# Altium PCB Discrete_3V3_Linear_Regulator.PcbDoc
Units mm, origin at the board's own origin, x right, y up, seen from the top; angles counter-clockwise.
Board outline 30.48 x 24.1 mm, 2 copper layers (Top Layer, Bottom Layer); 21 components, 11 nets, 47 pads, 3 vias.
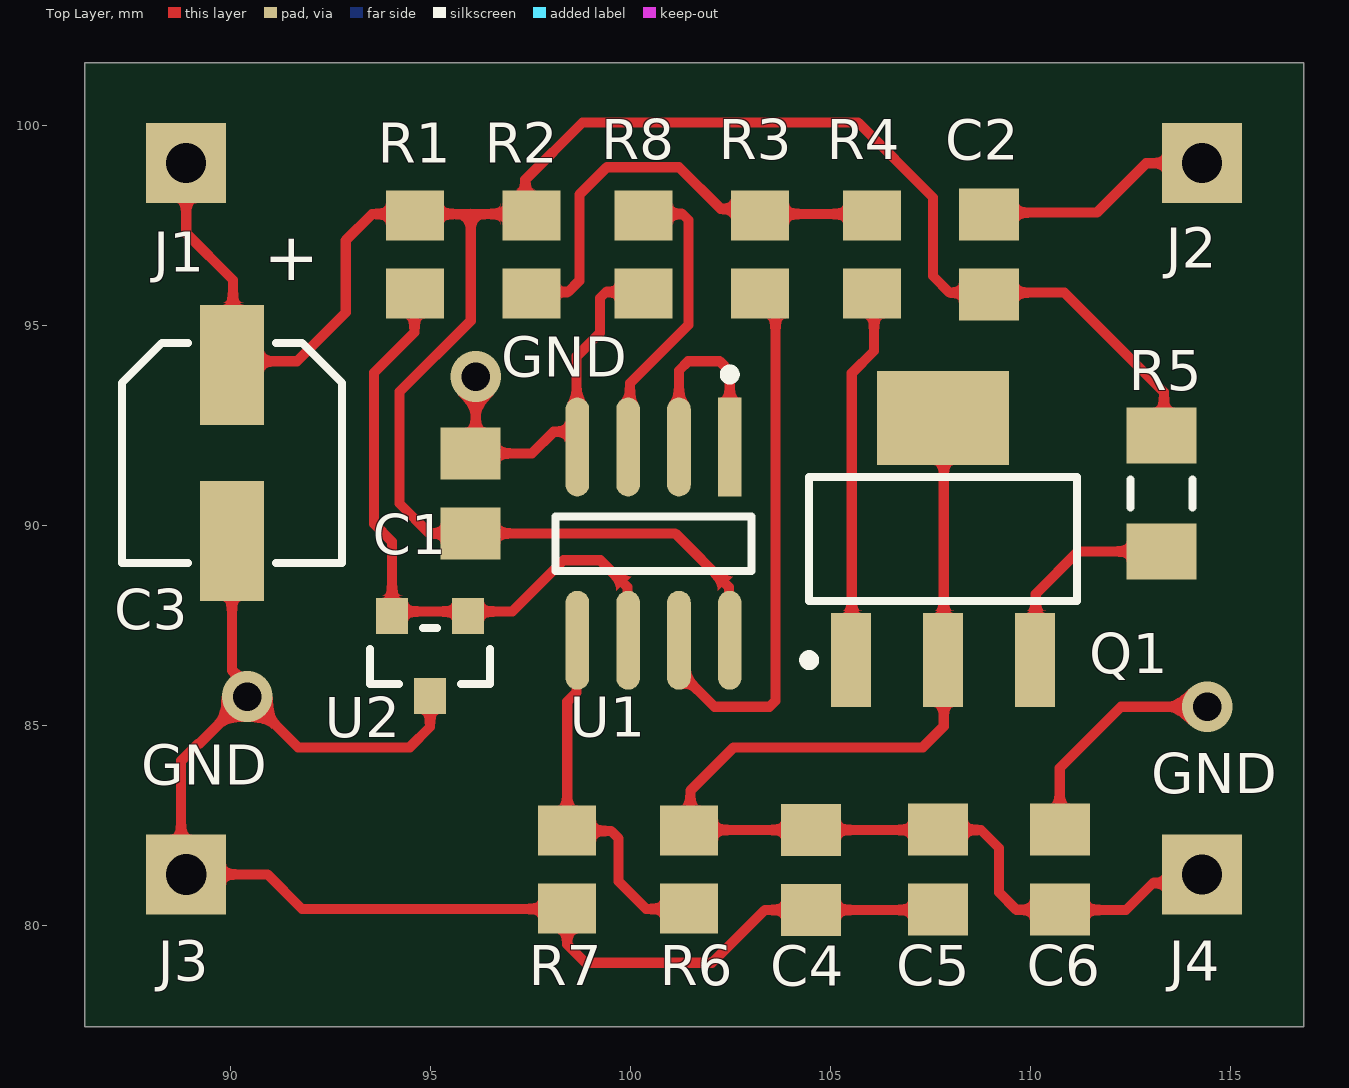
[diagram p0: Top Layer view]
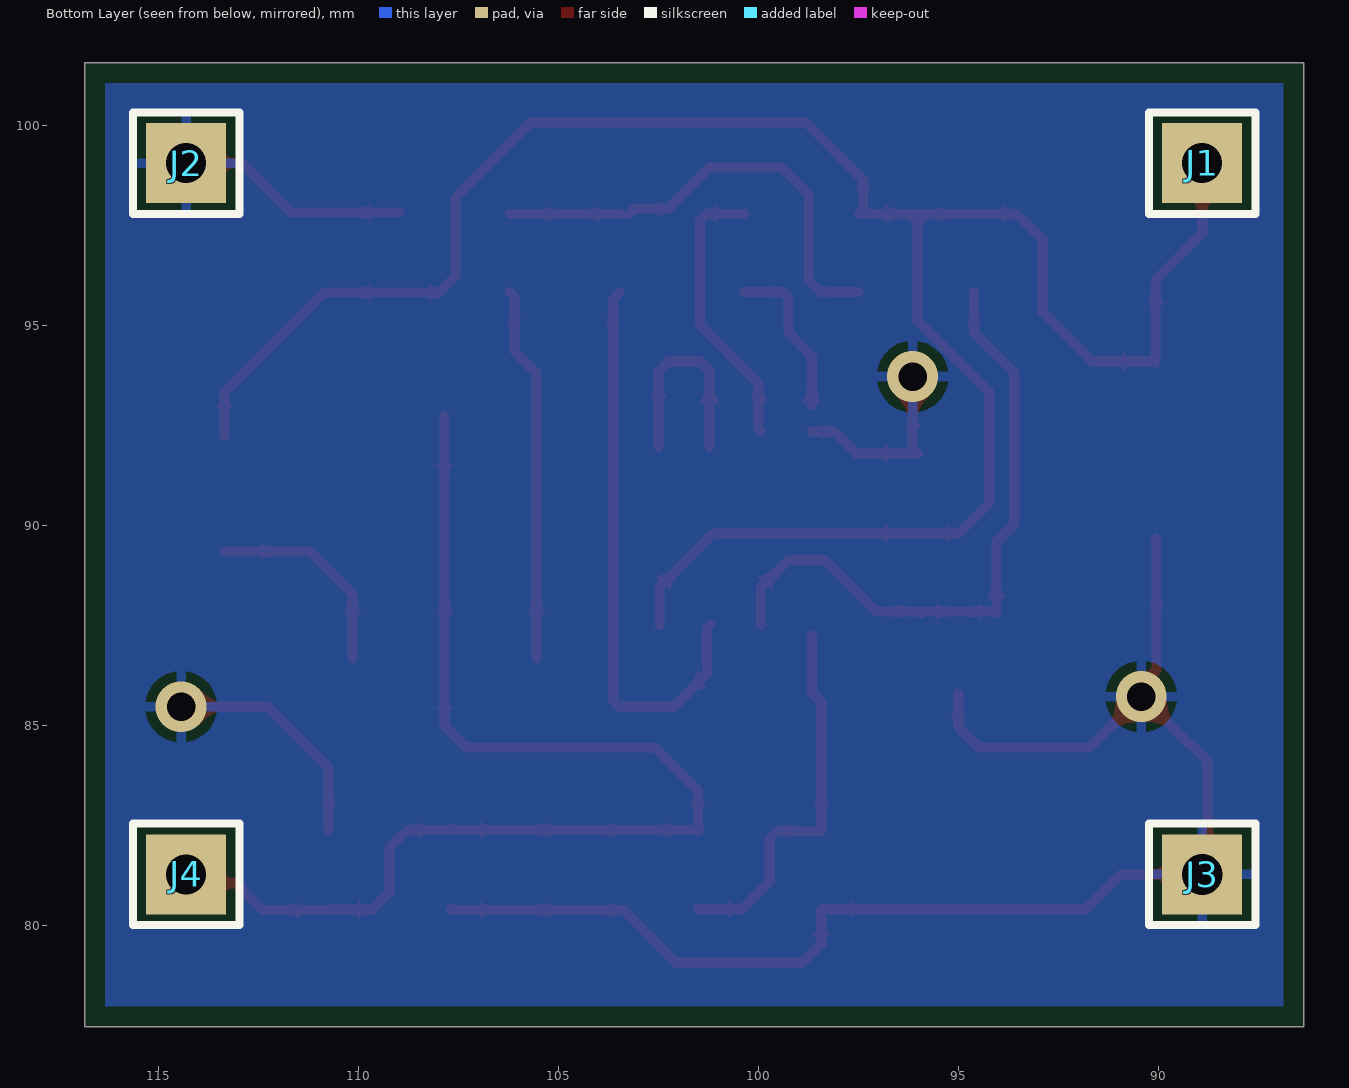
[diagram p1: Bottom Layer view, seen from below]
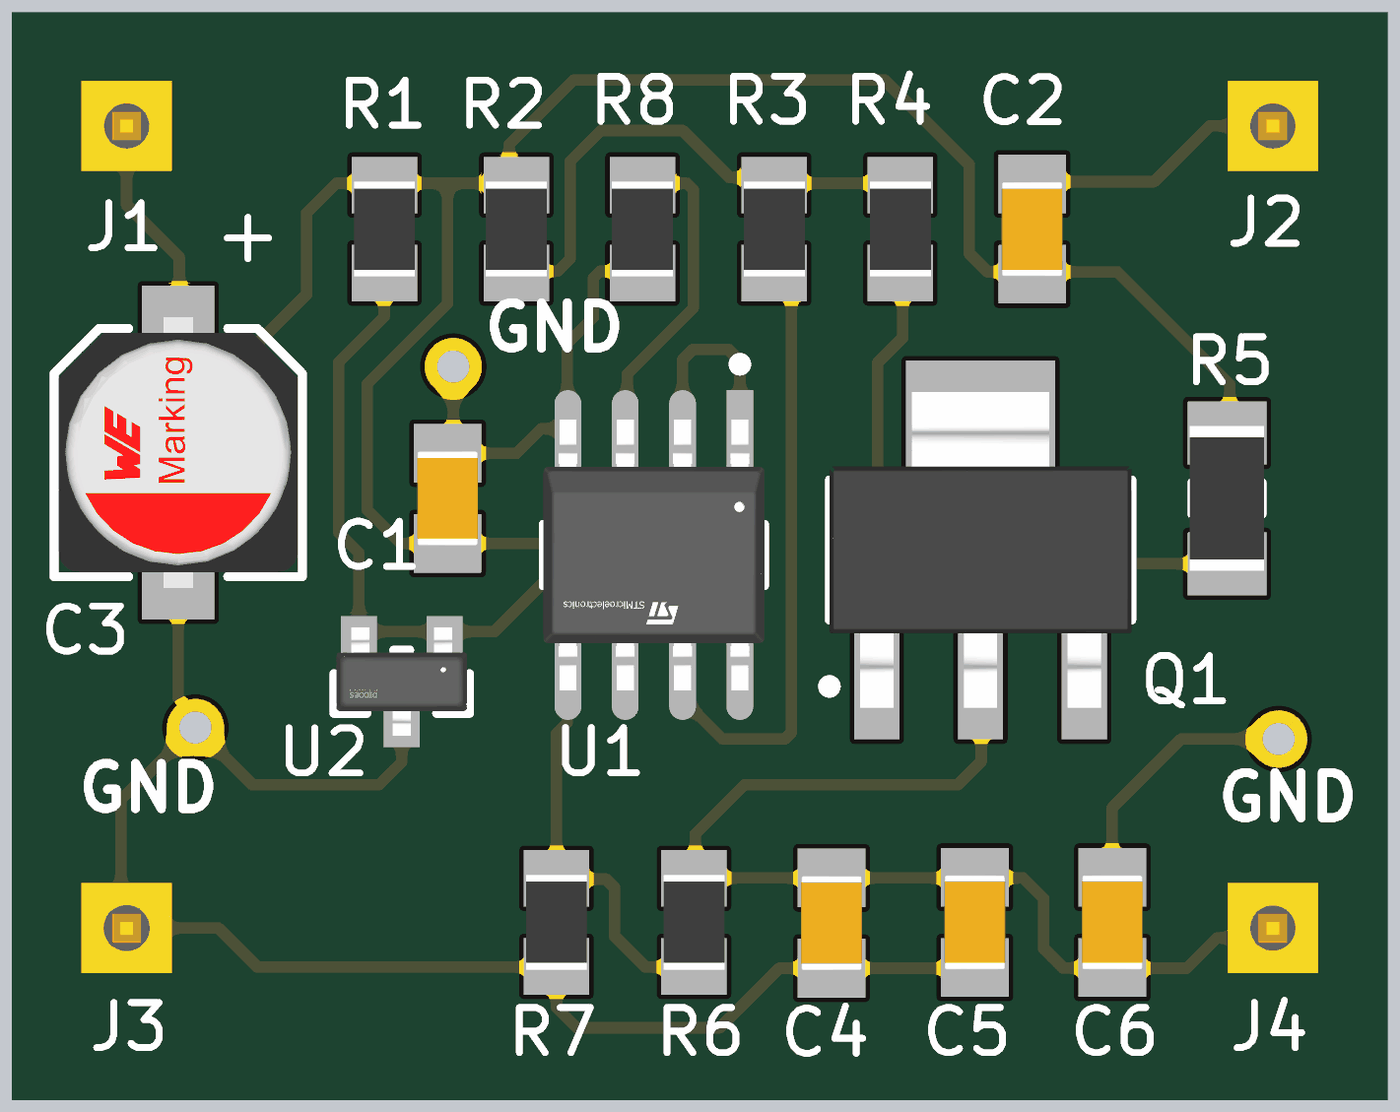
[diagram p2: 3D render of the assembled board from above, using the file's embedded part models]

## Layer stack, top to bottom
Top Solder: solder mask 0.0102, Solder Resist, Dk 3.5
Top Layer: signal copper 0.0356
Dielectric 1: dielectric 0.32, FR-4, Dk 4.8
Bottom Layer: signal copper 0.0356
Bottom Solder: solder mask 0.0102, Solder Resist, Dk 3.5

## Board outline
86.36,77.47 116.84,77.47 116.84,101.575 86.36,101.575

## Design rules (kind name [scope] priority, off if disabled: settings)
BoardOutlineClearance [All] p1: gap=0.508 ignorepadtopadclearanceinfootprint=FALSE
Clearance [All] p1: gap=0.254 ignorepadtopadclearanceinfootprint=FALSE
PolygonConnect [All] p1: connectstyle=Relief reliefconductorwidth=0.254 reliefentries=4 polygonreliefangle="90 Angle" airgapwidth=0.254
RoutingVias [All] p1: holewidth=0.711 width=1.27 viastyle="Through Hole" minholewidth=0.711 minwidth=1.27 maxholewidth=0.711 maxwidth=1.27
SilkToSilkClearance [All] p1: silktosilkclearance=0.1
SilkToSolderMaskClearance [IsPad] p1: minsilkscreentomaskgap=0.1 clearancetoexposedcopper=TRUE
SolderMaskExpansion [All] p1: expansion=0.102 istentingtop=FALSE
SupplyNets "Schematic Supply Nets_1" [InNet('+5')] p1: voltage=0.000
SupplyNets "Schematic Supply Nets" [InNet('GND')] p2: voltage=0.000
Width [All] p1: maxlimit=0.254 minlimit=0.254 preferedwidth=0.254
28 further rules are at their usual default settings.

## Components (designator, comment, footprint, x,y, rotation, side; value= is the part's Value field where it differs from the comment)
C1 "0.1 µF" CAP_0805_IPC_M 96.012,90.805 r90 top
C2 "10 µF" CAP_0805_IPC_M 108.966,96.774 r90 top
C3 "10 µF" WCAP-PSLP_D5H5.5 90.043,91.821 r90 top locked value=100µF
C4 "22 µF" CAP_0805_IPC_M 104.521,81.391 r270 top
C5 "0.1 µF" CAP_0805_IPC_M 107.696,81.407 r270 top
C6 "22 µF" CAP_0805_IPC_M 110.744,81.407 r90 top
J1 "HTSW-101-07-L-S" FP-HTSW-101-07-L-S-MFG#1 88.9,99.06 r180 bottom
J2 "HTSW-101-07-L-S" FP-HTSW-101-07-L-S-MFG#1 114.3,99.06 r180 bottom
J3 "HTSW-101-07-L-S" FP-HTSW-101-07-L-S-MFG#2 88.9,81.28 r180 bottom
J4 "HTSW-101-07-L-S" FP-HTSW-101-07-L-S-MFG#1 114.3,81.28 r180 bottom
Q1 "FZT1151ATA" SOT223_4P_TAB_IPC_L 107.823,89.662 r90 top
R1 "1.8 kΩ" RES_0805_IPC_M 94.615,96.774 r270 top locked
R2 "10 kΩ" RES_0805_IPC_M 97.536,96.774 r270 top
R3 "2.7 kΩ" RES_0805_IPC_M 103.251,96.774 r90 top
R4 "470 Ω" RES_0805_IPC_M 106.045,96.774 r270 top
R5 "0.22 Ω" RES_1206_IPC_M 113.284,90.805 r270 top
R6 "10 kΩ" RES_0805_IPC_M 101.473,81.407 r270 top
R7 "30.1 kΩ" RES_0805_IPC_M 98.425,81.407 r270 top
R8 "10 kΩ" RES_0805_IPC_M 100.33,96.774 r270 top
U1 "LM358ADT" FP-SO8-IPC_A 100.584,89.549 r270 top
U2 "TL431ASA-7" FP-SOT23-MFG 94.996,86.741 r270 top

## Footprints (in the part's own frame and the unit in brackets; to place one, negate y for a bottom-side part, rotate by r counter-clockwise, add the part's x,y. Pads: shape width x height; smd on the part's side, far side on the other; paste and mask are expansions set on the pad)
CAP_0805_IPC_M [mm] "Chip capacitor 0805 (2.00x1.25x0.50mm) - IPC Most"
  rect 1.3x1.5 smd: 1(-1,0) 2(1,0)
  body extent -1.05,-0.67 1.05,0.67, height 0.6
FP-HTSW-101-07-L-S-MFG#1 [mm]
  rect 2x2 hole 1 paste-2539.97 mask+0: 1(0,0)
  silkscreen extent -1.33,-1.27 1.33,1.27, body extent -1.27,-1.24 1.27,1.24, height 8.38
FP-HTSW-101-07-L-S-MFG#2 [mm]
  rect 2x2 hole 1.02 paste-2539.97 mask+0: 1(0,0)
  silkscreen extent -1.33,-1.27 1.33,1.27, body extent -1.27,-1.24 1.27,1.24, height 8.38
FP-SO8-IPC_A [mm]
  rect 2.474x0.592 smd paste+0 mask+0: 1(-2.416,1.905)
  rrect100% 2.474x0.592 smd paste+0 mask+0: 2(-2.416,0.635) 3(-2.416,-0.635) 4(-2.416,-1.905) 5(2.416,-1.905) 6(2.416,-0.635) 7(2.416,0.635) 8(2.416,1.905)
  silkscreen extent -4.35,-2.45 0.68,2.45, body extent -4.15,-2.95 4.15,2.95, height 0.25
FP-SOT23-MFG [mm]
  rect 0.9x0.8 smd paste+0 mask+0: 1(-1,0.95) 2(-1,-0.95) 3(1,0)
  silkscreen extent -0.7,-1.5 0.7,1.5, body extent -1.55,-1.6 1.55,1.6, height 0.25
RES_0805_IPC_M [mm] "Chip resistor 0805 (2.00x1.25x0.50mm) - IPC Most"
  rect 1.25x1.45 smd: 1(-0.975,0) 2(0.975,0)
  body extent -1.05,-0.67 1.05,0.67, height 0.6
RES_1206_IPC_M [mm] "Chip resistor 1206 (3.10x1.55x0.55mm) - IPC Most"
  rect 1.4x1.75 smd: 1(-1.45,0) 2(1.45,0)
  silkscreen extent -0.35,-0.77 0.35,0.77, body extent -1.6,-0.82 1.6,0.82, height 0.65
SOT223_4P_TAB_IPC_L [mm] "SOT223, 4-Leads, Body 6.50x7.00mm (avg), Pitch 2.30mm, IPC Low Density"
  rect 2.35x1 smd: 1(-3.025,2.3) 2(-3.025,-2.3) 3(-3.025,0)
  rect 2.35x3.3 smd: 4(3.025,0)
  silkscreen extent -3.15,-3.35 1.55,3.47, body extent -3.5,-3.35 3.5,3.35, height 1.7
WCAP-PSLP_D5H5.5 [mm] "Aluminum Polymer Capacitors, body diameter 5mm"
  rect 3x1.6 smd: 1(2.2,0) 2(-2.2,0)
  silkscreen extent -2.75,-2.75 2.75,2.75, body extent -3,-2.65 3,2.65, height 5.5

## Part data
C1 C5: library part C, "Generic non-polarized capacitor (ceramic/film), value defined per instance", Supplier Part Number=490-16471-1-ND, Supplier=DigiKey
C2: library part C, "Generic non-polarized capacitor (ceramic/film), value defined per instance", Supplier Part Number=445-12654-1-ND, Supplier=DigiKey
C3: library part C_POL, "WCAP-PSLP Radial Can - SMD Aluminum Polymer Capacitor 0.197Dia 5.00mm ±20% 100muF 10V", Case/Package=Radial, ESR (Equivalent Series Resistance)=30mΩ, Leakage Current=300µA, Manufacturer="Wurth Elektronik", Manufacturer Part Number=875105242010, Max Operating Temperature=105°C, Min Operating Temperature=-55°C, Ripple Current=1.97A, Supplier Part Number=732-6410-1-ND, Tolerance=20%, Voltage Rating=10V, Category="Polymer Capacitors", ComponentLink1Description=https://datasheet.octopart.com:443/875105242010-W%C3%BCrth-Elektronik-datasheet-37144755.pdf?src-supplier=Wurth+Elektronik, ComponentLink1URL=https://datasheet.octopart.com:443/875105242010-W%C3%BCrth-Elektronik-datasheet-37144755.pdf?src-supplier=Wurth+Elektronik, ComponentLink2Description=https://datasheet.octopart.com:443/875105242010-Wurth-Elektronik-datasheet-181970813.pdf?src-supplier=Future+Electronics, ComponentLink2URL=https://datasheet.octopart.com:443/875105242010-Wurth-Elektronik-datasheet-181970813.pdf?src-supplier=Future+Electronics, Diameter=5mm, Dissipation Factor=8%, Height=5.5mm, Height - Seated (Max)=5.5118mm, Length=5.5mm, Life (Hours)=2000hours, Material=Polymer, Mounting Technology="Surface Mount", Packaging="Tape & Reel (TR)", Pitch=5.3mm, Polarity=Polar, Pricing="1=0.6, 50=0.508, 100=0.441, 250=0.392, 500=0.343 (USD)", REACH SVHC=Unknown, RoHS=Compliant, Stock=19542, Supplier=DigiKey, Supplier 1=Newark, Supplier Part Number 1=875105242010, Voltage Rating (DC)=10V, Width=5.3mm
C4 C6: library part C, "Generic non-polarized capacitor (ceramic/film), value defined per instance", Supplier Part Number=445-5723-1-ND, Supplier=DigiKey
J1 J2 J3 J4: library part CMP-02766-001464-1, "CONN HEADER VERT 1POS", Housing Color=Natural, Max Current Rating=7.6A, Max Operating Temperature=125°C, Max Voltage Rating (AC)=550V, Min Operating Temperature=-55°C, Supplier Part Number=SAM15192-ND, Contact Material=Bronze, Contact Plating=Gold, Depth=2.48mm, Gender=Male, Housing Material=Polymer, Length=2.54mm, Number of Contacts=1, Number of Rows=1, Orientation=Straight, Packaging=Bulk, Radiation Hardening=No, REACH SVHC="No SVHC", RoHS Compliant=Yes, Supplier=DigiKey, Termination=Solder
Q1: library part BJT_PNP, "Generic PNP BJT transistor symbol (discrete)", Supplier Part Number=FZT1151ACT-ND, Supplier=DigiKey
R1 R2 R3 R4 R5 R6 R7 R8: library part R, "Generic resistor, value defined per instance"
U1: library part CMP-12131-000002-1, "IC OPAMP GP 2 CIRCUIT 8SO", Input Bias Current=0.02uA, Input Offset Voltage=1mV, Manufacturer=STMicroelectronics, Max Dual Supply Voltage=15V, Max Junction Temp=+150°C, Max Supply Voltage=30V, Min Dual Supply Voltage=1.5V, Min Supply Voltage=3V, Nominal Supply Current=0.7mA, Output Current Per Channel=50-20000uA, Package=SO8, Supplier Part Number=497-1590-1-ND, Temperature="0°C to +70°C", Temperature Range High=+70°C, Temperature Range Low=0°C, Voltage Gain=100V/mV, Automotive=No, Category=IC, ComponentLink2Description=Datasheet, ComponentLink2URL=https://www.st.com/content/ccc/resource/technical/document/datasheet/61/46/87/01/98/ed/44/c5/CD00000464.pdf/files/CD00000464.pdf/jcr:content/translations/en.CD00000464.pdf, Device Class L1="Integrated Circuits (ICs)", Device Class L2="Linear ICs", Device Class L3="Amplifiers - Op Amps", Digikey Description="IC OPAMP GP 2 CIRCUIT 8SO", Gain Bandwidth=1.1MHz, Height=1.75mm, Lead Free=Yes, Manufacturer Part Number=LM358ADT, Mouser Description="In a Pack of 20, LM358ADT STMicroelectronics, Low Power, Op Amp, 1.1MHz, 5 ? 28 V, 8-Pin SOIC", Number Of Channels=2, Octopart=https://octopart.com/lm358adt-stmicroelectronics-410420, RoHS=TRUE, Standoff Height=0.1mm, Supplier=DigiKey
U2: library part CMP-12755-000001-1, "IC VREF SHUNT ADJ SOT23-3", Ambient Temperature Range High=+125°C, Ambient Temperature Range Low=-40°C, Manufacturer="DIODES INC.", Max Junction Temp=+150°C, Max Power Dissipation=330mW, Package=SOT23, Supplier Part Number=TL431ASA-7DICT-ND, Temperature="to +150°C", Automotive=No, Category=IC, ComponentLink2Description=Datasheet, ComponentLink2URL=https://www.diodes.com/assets/Datasheets/TL431_432.pdf, Device Class L1="Integrated Circuits (ICs)", Device Class L2="Power Management ICs", Device Class L3="Voltage References", Digikey Description="IC VREF SHUNT ADJ SOT23-3", Footprint Url=https://www.diodes.com/assets/Package-Files/SOT23.pdf, Height=1.1mm, Ipc Land Pattern Name=SOT92P240X102-3, Lead Free=Yes, Manufacturer Part Number=TL431ASA-7, Mouser Description="V-Ref Adjustable 2.495V to 36V 100mA 3-Pin SOT-23 T/R", Octopart=https://octopart.com/tl431asa-7-diodes+inc.-18832779, Output Type=AdjustableProgrammable, Reference Type=Shunt, RoHS=TRUE, Standoff Height=0.013mm, Supplier=DigiKey, Temperature Range High=+150°C

## Via types
v1: diameter 1.27, hole 0.711, Top Layer to Bottom Layer, 3 vias

## Nets (pads, with @x,y where several pads share a name; then routed paths per layer and width w, separated by ;. In a path a pad name is that pad's centre, name@x,y a point inside that pad or via, vN(x,y) a via of type N, cw(c..) or ccw(c..) an arc to the next point about the centre after c; other vN are vias at no path point)
+5: C1.1 C2.1 C3.1 J1.1 R1.1 R2.1 R5.1 U1.8 | length 55.9
  Top Layer w0.254: J1.1 88.9,97.307 90.068,96.139 90.068,94.072 90.104,94.107 91.669,94.107 92.888,95.326 92.888,97.13 93.532,97.774 ; 93.548,97.79 94.607,97.79 96.012,97.79 ; R2.1@97.479,97.79 R2.1@97.377,97.892 ; U1.8@102.471,87.516 102.471,88.457 101.123,89.805 C1.1 94.98,89.805 94.234,90.551 94.234,93.345 96.012,95.123 96.012,97.79 ; R5.1@113.344,92.255 113.344,93.336 110.856,95.824 108.966,95.824 107.984,95.824 107.569,96.239 107.569,98.204 105.697,100.076 98.806,100.076 97.377,98.647 R2.1@97.377,97.892 ; 96.012,97.79 97.275,97.79 R2.1@97.377,97.892
Base: Q1.1 R4.2 | length 9.4
  Top Layer w0.254: Q1.1@105.54,86.695 105.54,93.809 106.096,94.365 106.096,95.724 R4.2@106.212,95.84
Base_Network: R2.2 R3.2 R4.1 | length 11.5
  Top Layer w0.254: R2.2@97.479,95.84 98.448,95.84 98.73,96.121 98.73,98.273 99.416,98.958 101.22,98.958 102.261,97.917 103.096,97.917 R3.2@103.223,97.79 ; R3.2@103.458,97.79 106.094,97.79 R4.1@106.212,97.79
Collector: C4.1 C5.1 C6.1 J4.1 Q1.3 Q1.4 R6.1 | length 30.8
  Top Layer w0.254: R6.1 101.489,82.366 R6.1@101.503,82.366 ; C5.1 107.675,82.407 107.659,82.391 108.769,82.391 109.22,81.94 109.22,80.83 109.655,80.395 110.733,80.395 110.737,80.391 112.395,80.391 113.068,81.064 113.703,81.064 113.919,81.28 J4.1@114.3,80.899 ; C5.1@107.759,82.391 C4.1 101.528,82.391 R6.1@101.503,82.366 ; Q1.4@107.84,92.745 107.84,86.695 107.84,84.98 107.315,84.455 102.586,84.455 101.503,83.372 R6.1@101.503,82.366
Emitter: Q1.2 R5.2 | length 5.2
  Top Layer w0.254: Q1.2@110.14,86.695 110.14,88.291 111.203,89.355 R5.2@113.344,89.355
FB: R6.2 R7.1 U1.5 | length 9.5
  Top Layer w0.254: U1.5@98.661,87.249 98.661,85.834 98.425,85.598 98.425,82.366 99.523,82.366 99.71,82.179 99.71,81.103 100.397,80.416 R6.2@101.503,80.416
GND: C1.2 C2.2 C3.2 C4.2 C5.2 C6.2 J2.1 J3.1 R7.2 R8.2 U1.4 U2.3 | length 56.9
  Top Layer w0.254: C3.2@90.068,89.672 90.043,89.646 C3.2 90.043,86.381 90.424,86 v1(90.424,85.725) ; U2.3@94.996,85.801 U2.3 94.996,84.963 94.488,84.455 91.694,84.455 v1(90.424,85.725) ; v1(96.139,93.726) 96.139,91.932 C1.2 97.545,91.805 98.088,92.348 U1.4@98.661,92.348 ; U1.4@98.661,93.006 98.661,94.237 99.245,94.821 99.245,95.691 99.394,95.84 R8.2@100.351,95.84 ; C4.2 103.367,80.391 102.046,79.07 98.882,79.07 98.425,79.527 98.425,80.416 91.796,80.416 90.932,81.28 J3.1 88.773,81.407 88.773,84.125 89.185,84.536 89.214,84.536 90.403,85.725 v1(90.424,85.725) ; C4.2@104.581,80.391 107.659,80.391 107.675,80.407 C5.2 ; C2.2@108.966,97.824 111.667,97.824 112.903,99.06 J2.1 ; C6.2@110.737,82.391 110.737,83.94 112.268,85.471 v1(114.427,85.471)
NetR8_1: R8.1 U1.3 | length 7.1
  Top Layer w0.254: U1.3@99.931,92.348 99.996,92.413 99.996,93.557 101.457,95.018 101.457,97.641 101.308,97.79 R8.1@100.351,97.79
OpAmp_Out: R3.1 U1.7 | length 14.3
  Top Layer w0.254: U1.7@101.201,87.516 101.284,87.433 101.284,86.295 102.108,85.471 103.483,85.471 103.632,85.62 103.632,95.665 R3.1@103.458,95.84
Vout_A_Null: U1.1 U1.2 | length 5.3
  Top Layer w0.254: U1.2 101.219,93.878 101.448,94.107 102.235,94.107 102.489,93.853 U1.1
Vref: R1.2 U1.6 U2.1 U2.2 | length 16.3
  Top Layer w0.254: R1.2@94.607,95.84 94.607,94.834 93.599,93.826 93.599,90.043 94.046,89.596 94.046,87.801 94.096,87.851 95.896,87.851 95.946,87.801 95.996,87.851 97.049,87.851 98.332,89.134 99.254,89.134 99.931,88.457 U1.6@99.931,87.516

## Polygon pours and split planes (outlines as drawn)
GND on Bottom Layer "GND_L02_P000" (solid, pour order 0): 86.36,101.6 86.36,77.47 116.84,77.47 116.84,101.6

## Silkscreen, mask and mechanical layers (free items; w line width, h text height)
Top Overlay:
  text "GND" at 96.774,93.726 h1
  text "GND" at 87.777,83.517 h1
  text "GND" at 113.03,83.312 h1

## Text inside footprints (layer, text, board x,y; h text height)
C3: Top Overlay "+" at 92.056,95.955 h1.2 r90